# Altium PCB Power regulator.PcbDoc
Units mil, origin at the board's own origin, x right, y up, seen from the top; angles counter-clockwise.
Board outline 9578.12 x 4384.59 mil, 2 copper layers (Top Layer, Top, Bottom Layer, Bottom); 13 components, 9 nets, 30 pads, 0 vias.
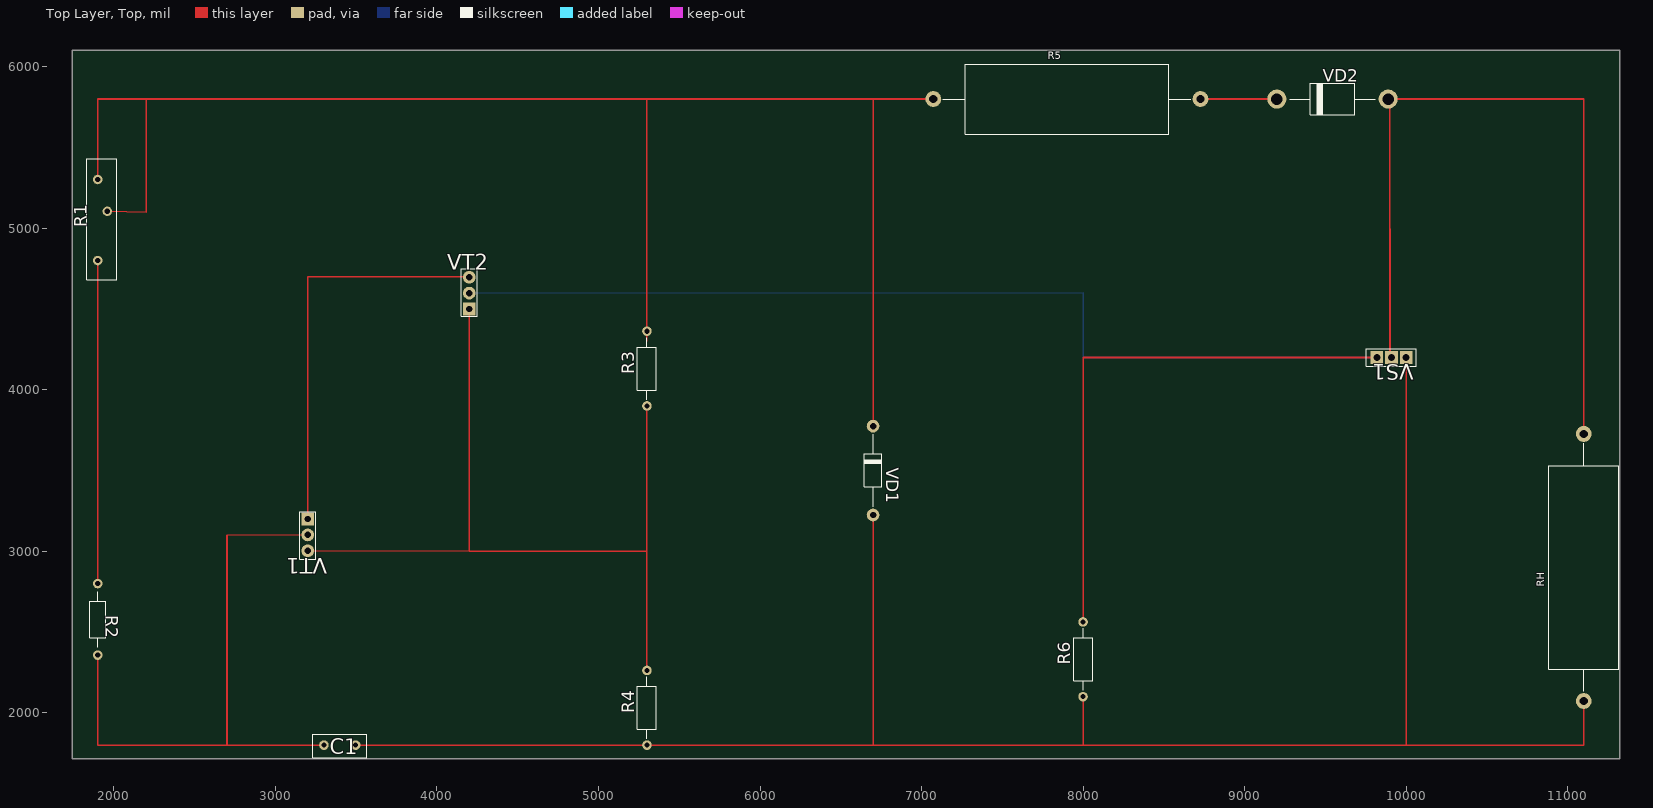
[diagram p0: Top Layer, Top view]
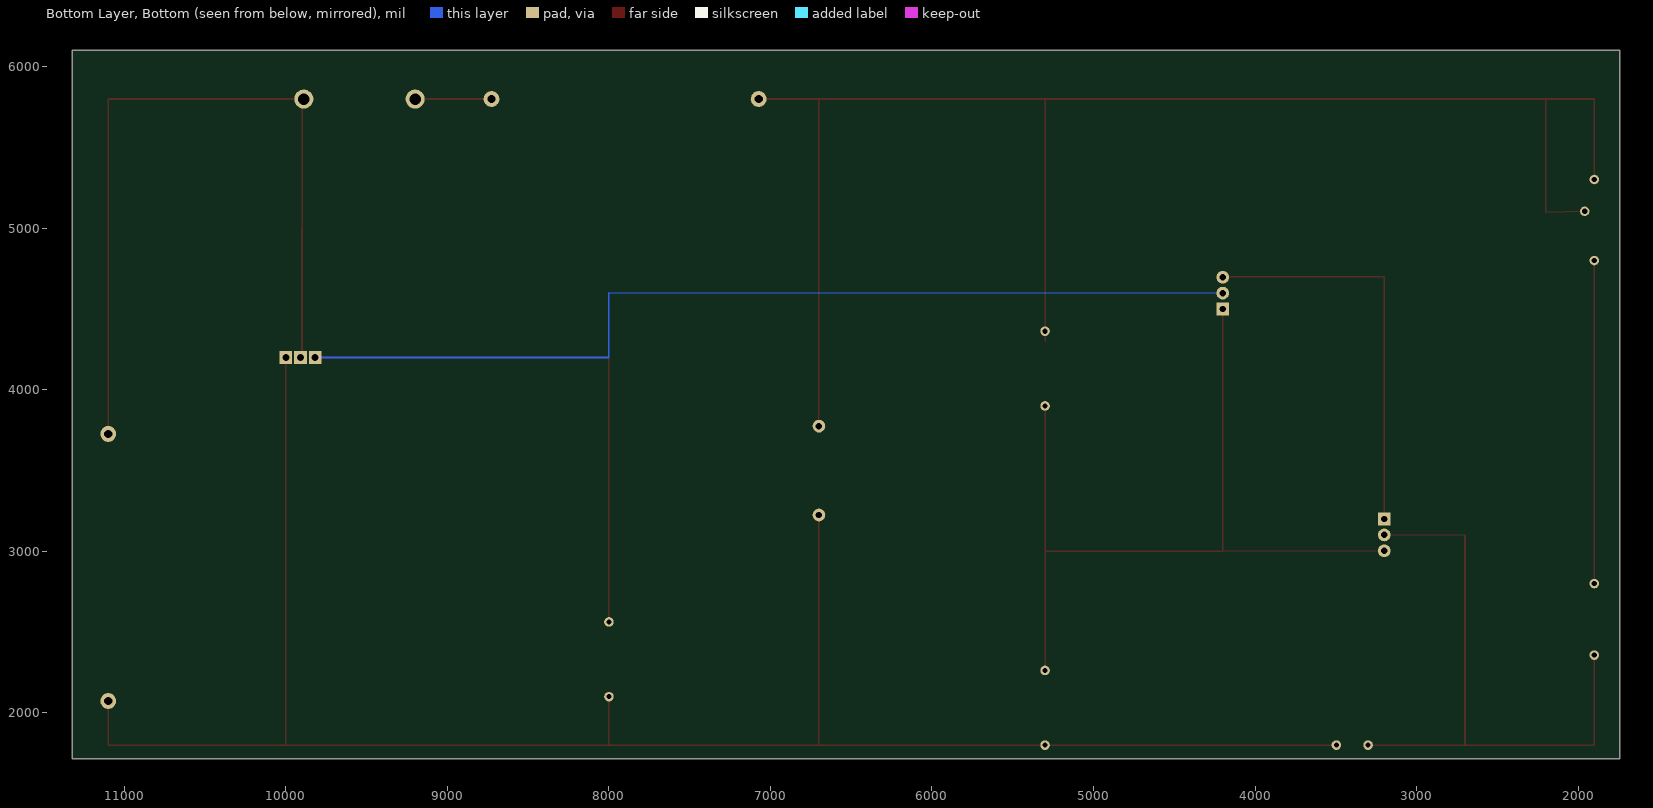
[diagram p1: Bottom Layer, Bottom view, seen from below]

## Layer stack, top to bottom
Top Solder, Top Mask: solder mask 0.4, Solder Resist, Dk 3.5
Top Layer, Top: signal copper 1.4
Dielectric 1: dielectric 12.6, FR-4, Dk 4.8
Bottom Layer, Bottom: signal copper 1.4
Bottom Solder, Bot Mask: solder mask 0.4, Solder Resist, Dk 3.5

## Board outline
1743.33,1716.34 11321.46,1716.34 11321.46,6100.93 1743.33,6100.93

## Design rules (kind name [scope] priority, off if disabled: settings)
Clearance [All] p1: gap=10 ignorepadtopadclearanceinfootprint=FALSE except(0: Arc-Hole Track-Hole SMDPad-Hole THPad-Hole Via-Hole Fill-Hole Poly-Hole Region-Hole Text-Hole; 11.81: Arc-Arc Arc-Track Arc-THPad Arc-Via Track-Track Track-THPad Track-Via THPad-THPad THPad-Via Via-Via)
PlaneClearance [All] p1: clearance=10
PolygonConnect [All] p1: connectstyle=Relief reliefconductorwidth=10 reliefentries=4 polygonreliefangle="90 Angle" airgapwidth=10
RoutingVias [All] p1: holewidth=28 width=50 viastyle="Through Hole" minholewidth=28 minwidth=50 maxholewidth=28 maxwidth=50
SolderMaskExpansion [All] p1: expansion=4 istentingtop=FALSE
Width [All] p1: maxlimit=10 minlimit=10 preferedwidth=10
29 further rules are at their usual default settings.

## Components (designator, comment, footprint, x,y, rotation, side; value= is the part's Value field where it differs from the comment)
C1 "0.1mk" 1812_DIP 3300,1800 r0 top
R1 "100k" 3006P 1900,4800 r90 top
R2 "4.7k" C2-33H-0.125W 1900,2800 r270 top
R3 "3k" C2-33H-0.25W 5300,3900 r90 top
R4 "3k" C2-33H-0.25W 5300,1800 r90 top
R5 "30k" C5-16MB-5BT 7900,5800 r0 top
R6 "" C2-33H-0.25W 8000,2100 r90 top
RH "" C5-16MB-5BT 11100,2900 r90 top
VD1 "" DO-35_BZX55-C30V(Primary) 6700,3500 r270 top
VD2 "" КД105_КД105Б(Primary) 9200,5800 r0 top
VS1 "" KT-27_Primary 10000,4200 r180 top
VT1 "" KT13_КТ361А(Primary) 3200,3200 r180 top
VT2 "" KT13_КТ315А(Primary) 4200,4500 r0 top

## Footprints (in the part's own frame and the unit in brackets; to place one, negate y for a bottom-side part, rotate by r counter-clockwise, add the part's x,y. Pads: shape width x height; smd on the part's side, far side on the other; paste and mask are expansions set on the pad)
1812_DIP [mm]
  round 1.5 hole 0.8: 1(0,0) 2(5,0)
  silkscreen extent -1.75,-2 6.75,1.75
3006P [mm]
  round 1.5 hole 0.8: 1(0,0) 2(7.75,-1.5) 3(12.75,0)
  silkscreen extent -3,-3 16,1.75
C2-33H-0.25W [mm]
  round 1.5 hole 0.8: 1(0,0) 2(11.75,0)
  silkscreen extent 1,-1.5 10.75,1.5
C2-33H-0.125W [mm]
  round 1.5 hole 0.8: 1(0,0) 2(11.25,0)
  silkscreen extent 1.25,-1.25 10,1.25
C5-16MB-5BT [mm]
  round 2.5 hole 1.3: 1(-21,0) 2(21,0)
  silkscreen extent -19.5,-5.5 19.5,5.5
DO-35_BZX55-C30V(Primary) [mm]
  round 2 hole 1: A(6.985,0) K(-6.985,0)
  silkscreen extent -5.71,-1.35 5.71,1.35
KT13_КТ315А(Primary) [mm]
  rect 2x2 hole 1: 1(0,0)
  round 2 hole 1: 2(0,5) 3(0,2.5)
  silkscreen extent -1.25,-1.17 1.25,6.33
KT13_КТ361А(Primary) [mm]
  round 2 hole 1: 1(0,2.5) 2(0,5)
  rect 2x2 hole 1: 3(0,0)
  silkscreen extent -1.25,-1.17 1.25,6.33
KT-27_Primary [mm]
  rect 2x2 hole 1.1: 1(0,0) 2(2.3,0) 3(4.6,0)
  silkscreen extent -1.56,-1.41 6.24,1.39
КД105_КД105Б(Primary) [mm]
  round 3 hole 1.8: A(17.5,0) K(0,0)
  silkscreen extent 2,-2.5 15.5,2.5

## Nets (pads, with @x,y where several pads share a name; then routed paths per layer and width w, separated by ;. In a path a pad name is that pad's centre, name@x,y a point inside that pad or via, vN(x,y) a via of type N, cw(c..) or ccw(c..) an arc to the next point about the centre after c; other vN are vias at no path point)
+220B: RH.2 VD2.A VS1.2 | length 4901.6
  Top Layer, Top w10: VS1.2 9900,4200 9897.64,5799.21 9893.7,5799.21 VD2.A 9900,5800 11100,5800 RH.2
NET00000: VT1.3 VT2.2 | length 2503.1
  Top Layer, Top w10: VT1.3 3200,4700 4200,4700 VT2.2
NET00001: R1.1 R2.1 | length 2000
  Top Layer, Top w10: R2.1 R1.1
NET00002: C1.1 R2.2 VT1.1 | length 3757.1
  Top Layer, Top w10: R2.2 1900,1800 2700,1800 ; VT1.1 2700,3100 2700,1800 ; C1.1 2700,1800
NET00003: C1.2 R4.1 R6.1 RH.1 VD1.A VS1.1 | length 12001.4
  Top Layer, Top w10: C1.2 R4.1 6700,1800 ; VD1.A 6700,1800 ; R6.1 8000,1800 ; VS1.1 10000,1800 ; RH.1 11100,1800 10000,1800 ; 6700,1800 8000,1800 ; 8000,1800 10000,1800
NET00004: R3.1 R4.2 VT1.2 VT2.1 | length 5237.4
  Top Layer, Top w10: VT1.2 4200,3000 ; VT2.1 4200,3000 ; R4.2 5300,3000 ; R3.1 5300,3000 ; 4200,3000 5300,3000
NET00005: R1.2 R1.3 R3.2 R5.1 VD1.K | length 13237.3
  Top Layer, Top w10: R1.3 1900,5800 2200,5800 ; R1.2 2200,5100 2200,5800 ; 5300,4300 R3.2 5300,5800 ; VD1.K 6700,5800 ; R5.1 6700,5800 ; 2200,5800 4800,5800 ; 2200,5800 4800,5800 ; 4800,5800 5300,5800 ; 4800,5800 5300,5800 ; 5300,5800 6700,5800
NET00006: R6.2 VS1.3 VT2.3 | length 9475.2
  Top Layer, Top w10: R6.2 8000,4200 VS1.3
  Bottom Layer, Bottom w10: VT2.3 8000,4600 8000,4200 VS1.3
NET00008: R5.2 VD2.K | length 473.2
  Top Layer, Top w10: R5.2 VD2.K

## Text inside footprints (layer, text, board x,y; h text height)
VT1: Mechanical 1, Top Assy "Б" at 3288.58,3019.69 h78.12 r180; Mechanical 1, Top Assy "К" at 3288.58,3118.11 h78.12 r180; Mechanical 1, Top Assy "Э" at 3288.58,3226.38 h78.12 r180
VT2: Mechanical 1, Top Assy "Б" at 4111.42,4680.31 h78.12; Mechanical 1, Top Assy "К" at 4111.42,4581.89 h78.12; Mechanical 1, Top Assy "Э" at 4111.42,4473.62 h78.12